# Altium PCB DevBoard.PcbDoc
Units mm, origin at the board's own origin, x right, y up, seen from the top; angles counter-clockwise.
Board outline 63.5 x 32.7 mm, 2 copper layers (Top Layer, Bottom Layer); 43 components, 53 nets, 211 pads, 137 vias.
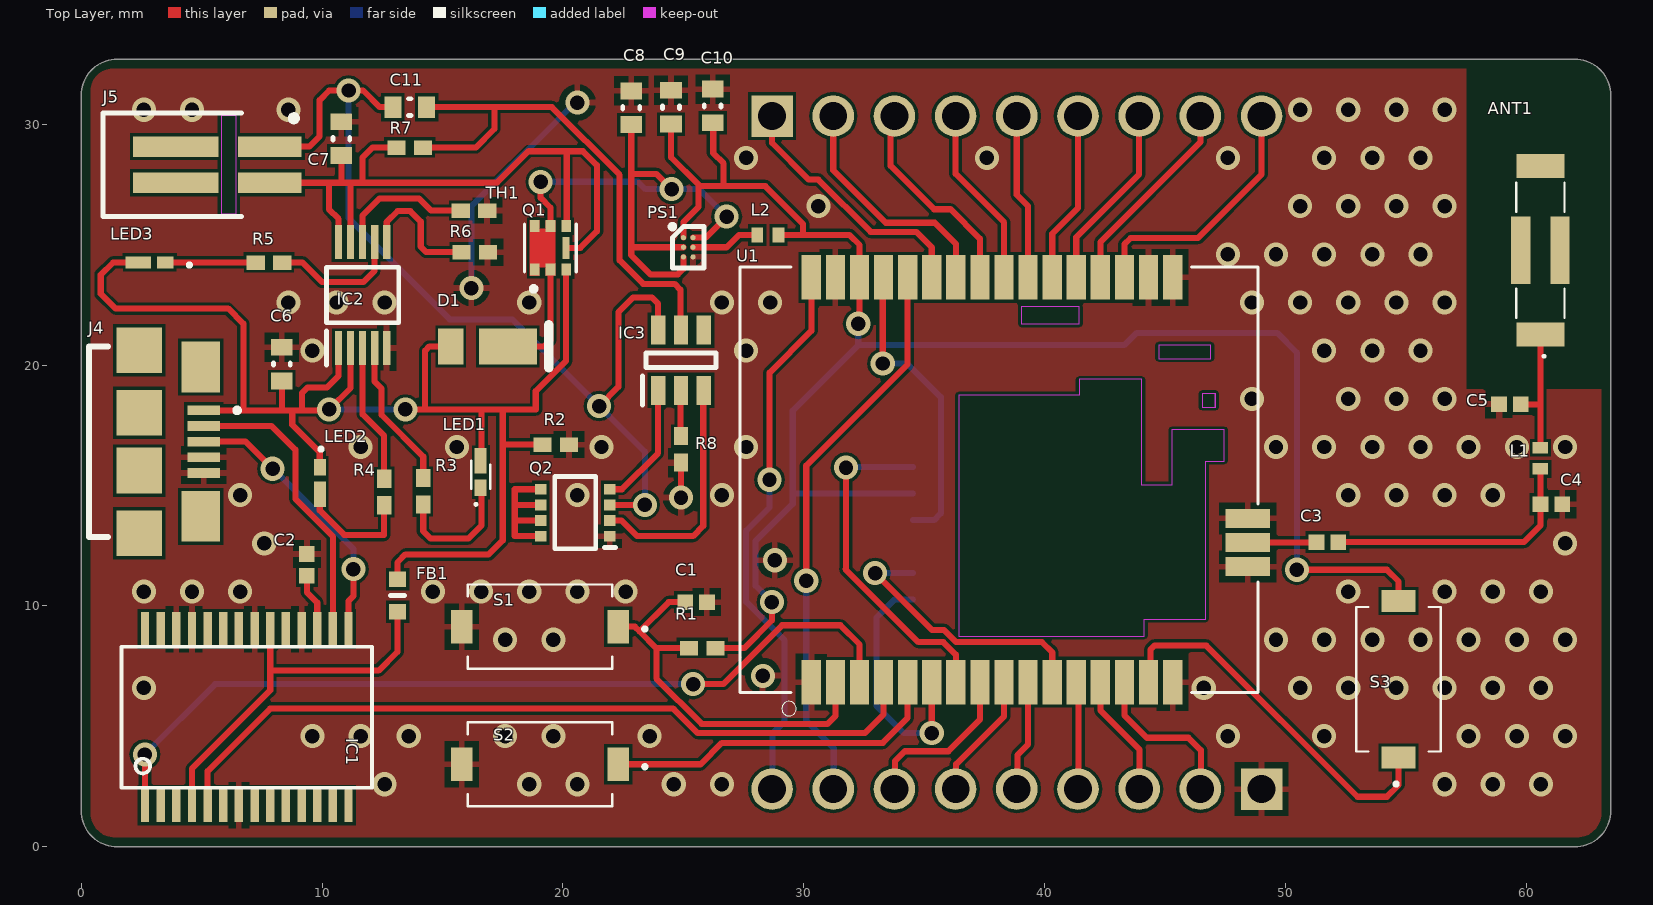
[diagram p0: Top Layer view]
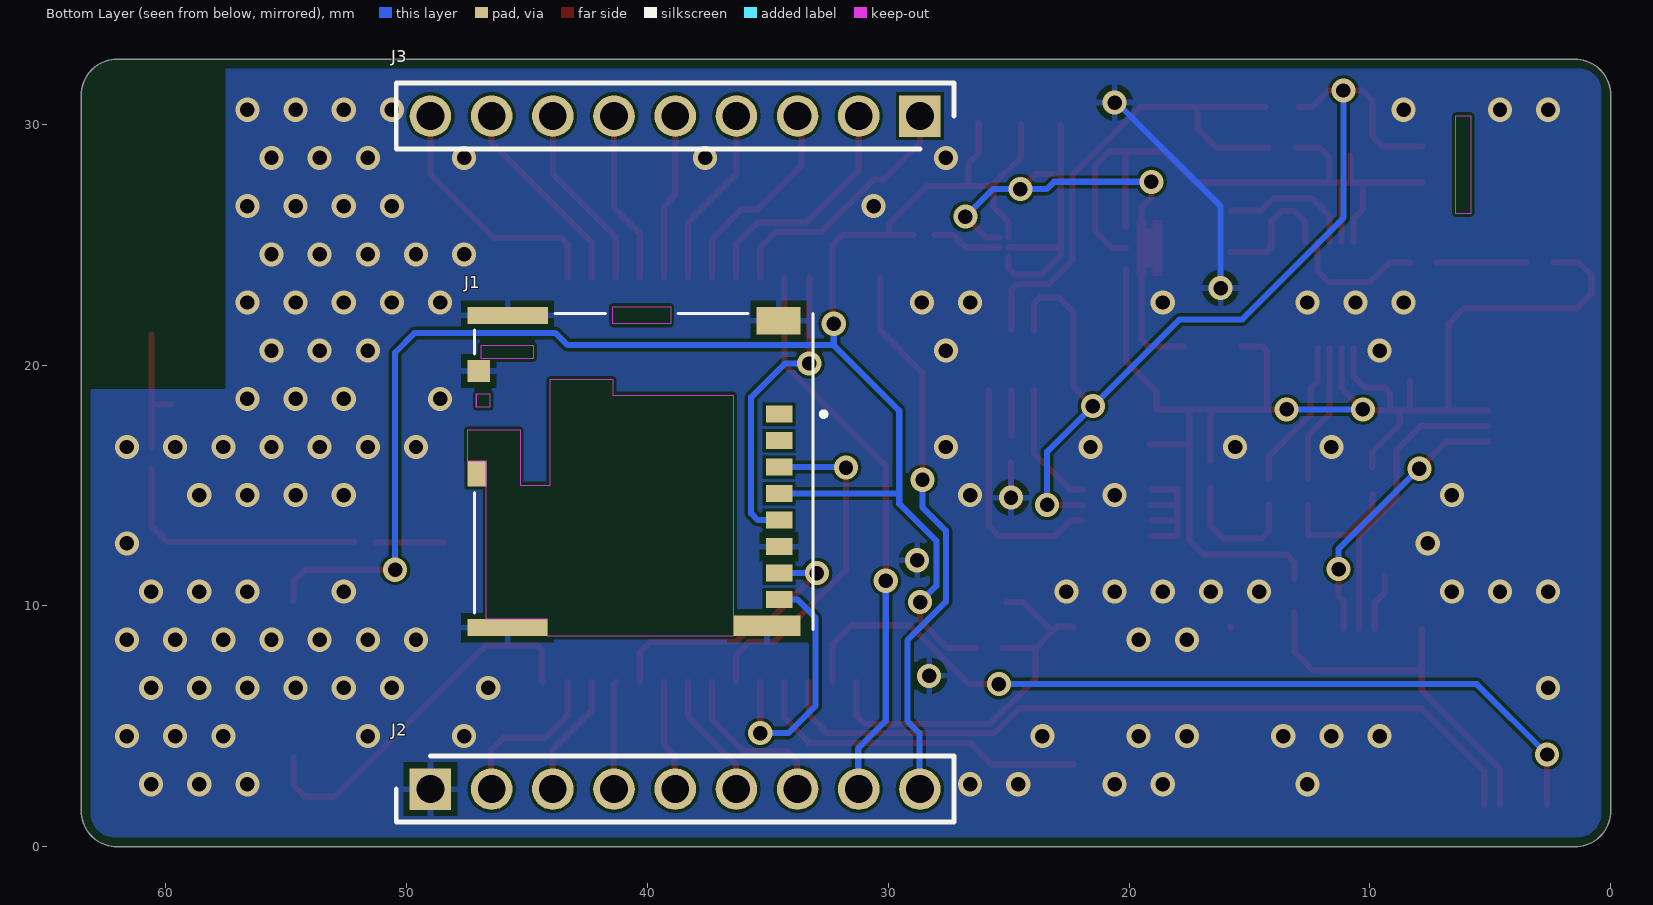
[diagram p1: Bottom Layer view, seen from below]
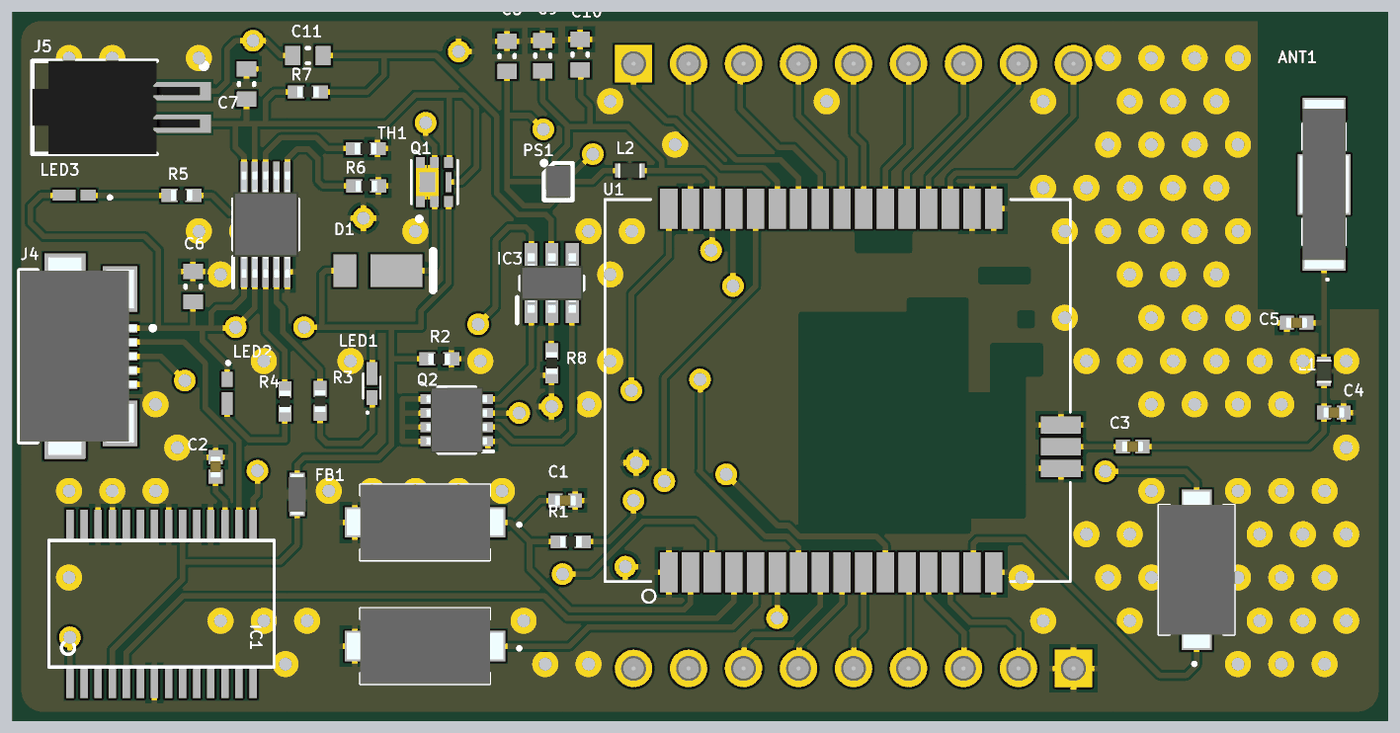
[diagram p2: 3D render of the assembled board from above, using the file's embedded part models]

## Layer stack, top to bottom
Top Solder: solder mask 0.0102, Solder Resist, Dk 3.5
Top Layer: signal copper 0.0356
Dielectric 1: dielectric 0.32, FR-4, Dk 4.8
Bottom Layer: signal copper 0.0356
Bottom Solder: solder mask 0.0102, Solder Resist, Dk 3.5

## Board outline
1.5,0 cw(c1.5,1.5) 0,1.5 0,31.2 cw(c1.5,31.2) 1.5,32.7 62,32.7 cw(c62,31.2) 63.5,31.2 63.5,1.5 cw(c62,1.5) 62,0

## Design rules (kind name [scope] priority, off if disabled: settings)
Clearance [All] p1: gap=0 ignorepadtopadclearanceinfootprint=FALSE
PolygonConnect [All] p1: connectstyle=Relief reliefconductorwidth=0.254 reliefentries=4 polygonreliefangle="90 Angle" airgapwidth=0.254
RoutingVias [All] p1: holewidth=0.6 width=1 viastyle="Through Hole" minholewidth=0.6 minwidth=1 maxholewidth=0.6 maxwidth=1
SolderMaskExpansion [All] p1: expansion=0.102
Width [All] p1: maxlimit=0.254 minlimit=0.254 preferedwidth=0.254
30 further rules are at their usual default settings.

## Components (designator, comment, footprint, x,y, rotation, side; value= is the part's Value field where it differs from the comment)
ANT1 "2450AT43B100E" 2450AT43B100E 60.579,24.765 r270 top
C1 "100nF 0402" CAPC1005X56N 25.527,10.16 r0 top
C2 "100pF 0402" CAPC1005X56N 9.373,11.709 r90 top
C3 "10pF 0402" CAPC1005X56N 51.733,12.649 r0 top
C4 "1,8pF 0402" CAPC1005X56N 61.029,14.224 r180 top
C5 "2,7pF 0402" CAPC1005X56N 59.309,18.369 r0 top
C6 "4,7uF 0603" CAPC0603(1608)100_L 8.331,20.041 r270 top value=1uF
C7 "4,7uF 0603" CAPC0603(1608)100_L 10.8,29.4 r270 top value=1uF
C8 "2,2uF 10V 0603" CAPC0603(1608)100_L 22.835,30.683 r270 top value=1uF
C9 "1uF 10V 0603" CAPC0603(1608)100_L 24.486,30.709 r270 top value=1uF
C10 "10uF 10V 0603" CAPC0603(1608)100_L 26.213,30.759 r270 top value=1uF
C11 "100nF 0603" CAPC0603(1608)100_L 13.64,30.709 r0 top value=1uF
D1 "DFLS160-7" DIOD-POWERDI123-2_V 16.866,20.777 r0 top
FB1 "BLM18SG331TN1D" BLM18SG121TN1J 13.132,10.439 r90 top
IC1 "FT232RL" SSOP28-LD 6.874,5.386 r0 top
IC2 "MCP73833-AMI_UN" SOP50P490X110-10N 11.684,22.911 r90 top
IC3 "S-8261ABJMD-G3JT2x" SOT95P275X135-6N 24.9,20.2 r90 top
J1 "503398-1892" MOLEX_503398-1892 40.154,15.584 r270 bottom
J2 "61300911121" HDRV9W95P0X254_1X9_2286X254X874P 49,2.4 r180 bottom
J3 "61300911121" HDRV9W95P0X254_1X9_2286X254X874P 28.68,30.34 r0 bottom
J4 "10118192-0001LF" 101181920001LF 3.406,16.821 r270 top
J5 "Conn_Molex_0874380243_eec" MOLEX_0874380243_0 3.779,28.321 r270 top
L1 "2.2nH 0402" INDC1006X60X20LL10T10 60.579,16.129 r90 top
L2 "0,47nH 0402" INDC1006X60X20LL10T10 28.507,25.4 r0 top
LED1 "BLUE" KBDELPS212QHRI24Z55510S 16.586,15.469 r90 top
LED2 "GREEN" KGDELLS122JGKH24 9.906,15.113 r0 top
LED3 "RED" KRDELPS122UHVI26H3Q4 2.845,24.257 r180 top
PS1 "LM3281YFQR" BGA6C40P2X3_116X144X68 25.2,24.892 r0 top
Q1 "DMP2066UFDE-7" MOSFET_DMP2066UFDE-7 19.482,24.867 r90 top
Q2 "QH8KA4TCR" SOTFL65P280X85-8N 20.512,13.873 r180 top
R1 "20k_0402" RESC1005X40N 25.781,8.255 r0 top
R2 "10k_0402" RESC1005X40N 19.7,16.7 r180 top
R3 "1k_0402" RESC1005X40N 14.199,14.757 r270 top
R4 "1k_0402" RESC1005X40N 12.573,14.732 r270 top
R5 "1k_0402" RESC1005X40N 7.798,24.257 r180 top
R6 "4k_0402" RESC1005X40N 16.332,24.689 r180 top
R7 "470_0402" RESC1005X40N 13.64,29.032 r180 top
R8 "2k_0402" RESC1005X40N 24.9,16.5 r90 top
S1 "PTS636_SM43J_SMTR_LFS" PTS636SM43JSMTRLFS 19.05,9.144 r180 top
S2 "PTS636_SM43J_SMTR_LFS" PTS636SM43JSMTRLFS 19.05,3.429 r180 top
S3 "PTS636_SM43J_SMTR_LFS" PTS636SM43JSMTRLFS 54.686,6.96 r90 top
TH1 "10k_thermistor_0402" RESC1005X40N 16.307,26.416 r180 top
U1 "W01-OEM" PYCOM_W01-OEM 38.1,15.24 r0 top

## Footprints (in the part's own frame and the unit in brackets; to place one, negate y for a bottom-side part, rotate by r counter-clockwise, add the part's x,y. Pads: shape width x height; smd on the part's side, far side on the other; paste and mask are expansions set on the pad)
2450AT43B100E [mm]
  rect 1x2 smd: 1(3.5,0) 2(-3.5,0)
  rect 2.8x0.8 smd: 3(0,0.815) 4(0,-0.815)
  silkscreen extent -2.8,-1 4.45,1, body extent -3.9,-1.13 3.9,1.13, height 2.2
101181920001LF [mm]
  rect 0.4x1.35 smd: 1(-1.3,1.682) 2(-0.65,1.682) 3(0,1.682) 4(0.65,1.682) 5(1.3,1.682)
  rect 2.1x1.6 smd: 6(-3.1,1.557) 7(3.1,1.557)
  rect 1.9x1.9 smd: 8(-1.2,-0.993) 9(1.2,-0.993) 10(-3.8,-0.993) 11(3.8,-0.993)
  silkscreen extent -3.95,-3.08 3.95,3.17, body extent -4.56,-3.08 4.56,2.32, height 2.9
BGA6C40P2X3_116X144X68 [mm]
  round 0.212 smd: A1(-0.2,0.4) A2(0.2,0.4) B1(-0.2,0) B2(0.2,0) C1(-0.2,-0.4) C2(0.2,-0.4)
  silkscreen extent -0.76,-0.86 0.66,0.96, body extent -0.58,-0.72 0.58,0.72, height 0.67
BLM18SG121TN1J [mm]
  rect 0.65x0.7 smd: 1(-0.675,0) 2(0.675,0)
  silkscreen extent 0,-0.3 0,0.3, body extent -0.93,-0.4 0.93,0.4, height 0.85
CAPC0603(1608)100_L [mm] "Chip Capacitor, Body 1.6x0.8mm, Height 1.0mm, IPC High Density"
  rect 0.7x0.9 smd: 1(-0.7,0) 2(0.7,0)
  silkscreen extent -0.05,-0.35 0.05,0.35, body extent -0.87,-0.47 0.88,0.48, height 1
CAPC1005X56N [mm]
  rect 0.65x0.64 smd: 1(-0.45,0) 2(0.45,0)
  body extent -0.5,-0.25 0.5,0.25, height 0.56
DIOD-POWERDI123-2_V [mm] "SOD, 2-Leads, Body 2.8x1.78mm"
  rect 1.05x1.5 smd: 1(-1.525,0)
  rect 2.4x1.5 smd: 2(0.85,0)
  silkscreen extent 2.55,-0.89 2.55,0.89, body extent -1.4,-0.89 1.4,0.89, height 1.01
HDRV9W95P0X254_1X9_2286X254X874P [mm]
  rect 1.725x1.725 hole 1.15: 1(0,0)
  round 1.725 hole 1.15: 2(2.54,0) 3(5.08,0) 4(7.62,0) 5(10.16,0) 6(12.7,0) 7(15.24,0) 8(17.78,0) 9(20.32,0)
  silkscreen extent -1.42,-1.37 21.74,1.37, body extent -1.27,-1.27 21.59,1.27, height 8.74
INDC1006X60X20LL10T10 [mm] "Chip Inductor, 2-Leads, Body 1.1x0.7mm, IPC High Density"
  rect 0.48x0.64 smd: 1(-0.44,0) 2(0.44,0)
  body extent -0.55,-0.35 0.55,0.35, height 0.6
KBDELPS212QHRI24Z55510S [mm]
  rect 0.7x0.5 smd: 1(-0.558,0)
  rect 1.05x0.5 smd: 2(0.558,0)
  silkscreen extent -1.3,-0.4 0.56,0.4
KGDELLS122JGKH24 [mm]
  rect 0.5x0.7 smd: 1(0,0.645)
  rect 0.5x1.05 smd: 2(0,-0.47)
  silkscreen extent 0,1.35 0.1,1.45
KRDELPS122UHVI26H3Q4 [mm]
  rect 0.7x0.5 smd: 1(-0.645,0)
  rect 1.05x0.5 smd: 2(0.47,0)
  silkscreen extent -1.7,0.05 -1.6,0.15
MOLEX_503398-1892 [mm]
  rect 0.7x1.1 smd: 1(-2.38,5.625) 2(-1.28,5.625) 3(-0.18,5.625) 4(0.92,5.625) 5(2.02,5.625) 6(3.12,5.625) 7(4.22,5.625) 8(5.32,5.625)
  rect 0.9x0.93 smd: 9(-4.17,-6.84)
  rect 1.05x0.78 smd: 10(0.095,-6.915)
  rect 1.14x1.83 smd: P1(-6.26,5.61)
  rect 0.86x2.8 smd: P2(6.4,5.125)
  rect 0.7x3.33 smd: P3(-6.48,-5.64) P4(6.48,-5.64)
  Keep-Out Layer region: 6.83,-3.975 6.13,-3.975 6.13,-6.525 -0.43,-6.525 -0.43,-7.305 -1.73,-7.305 -1.73,-5.125 0.57,-5.125 0.57,-3.875 -3.82,-3.875 -3.82,-1.275 -3.17,-1.275 -3.17,3.725 6.83,3.725
  Keep-Out Layer region: -2.67,-6.937 -3.225,-6.937 -3.225,-6.375 -2.67,-6.375
  Keep-Out Layer region: -4.685,-6.73 -5.239,-6.73 -5.239,-4.575 -4.685,-4.575
  Keep-Out Layer region: -6.13,-1.277 -6.842,-1.277 -6.842,1.125 -6.13,1.125
  Keep-Out Layer region: 6.83,-3.975 6.13,-3.975 6.13,-6.525 -0.43,-6.525 -0.43,-7.305 -1.73,-7.305 -1.73,-5.125 0.57,-5.125 0.57,-3.875 -3.82,-3.875 -3.82,-1.275 -3.17,-1.275 -3.17,3.725 6.83,3.725
  Keep-Out Layer region: -2.67,-6.93 -3.223,-6.93 -3.223,-6.375 -2.67,-6.375
  Keep-Out Layer region: -6.13,-1.276 -6.836,-1.276 -6.836,1.125 -6.13,1.125
  Keep-Out Layer region: -4.685,-6.738 -5.245,-6.738 -5.245,-4.575 -4.685,-4.575
  silkscreen extent -6.55,-7.02 6.55,7.57
MOLEX_0874380243_0 [mm]
  rect 0.85x2.65 smd paste+0 mask+0: 1(-0.75,4.05) 2(0.75,4.05)
  rect 0.85x3.55 smd paste+0 mask+0: ""(-0.75,0.15) ""(0.75,0.15)
  Keep-Out Layer region: -2.032,2.667 -2.032,2.032 2.032,2.032 2.032,2.667
  silkscreen extent -2.15,-2.88 2.15,5.18, body extent -2.35,-3.08 2.35,5.48, height 0.25
MOSFET_DMP2066UFDE-7 [mm]
  rect 0.5x0.4 smd: 1(-0.9,0.65) 2(-0.9,0) 3(-0.9,-0.65) 4(0.9,-0.65) 5(0.9,0) 6(0.9,0.65)
  rect 0.92x0.285 smd: 7(0,-0.65)
  Top Layer region: 1.15,0.46 0.8,0.46 0.8,0.19 1.13,0.19 1.13,-0.2 -1.15,-0.2 -1.15,0.19 -0.8,0.19 -0.8,0.46 -1.15,0.46 -1.15,0.85 1.15,0.85
  silkscreen extent -1.8,-1.07 1,1.07
PTS636SM43JSMTRLFS [mm]
  rect 0.9x1.4 smd: 1(-3.25,0) 2(3.25,0)
  silkscreen extent -4.4,-1.75 3,1.75, body extent -3.61,-1.75 3.61,1.75, height 4.4
PYCOM_W01-OEM [mm]
  rect 0.8x1.85 smd: 1(-7.79,-8.4) 2(-6.79,-8.4) 3(-5.79,-8.4) 4(-4.79,-8.4) 5(-3.79,-8.4) 6(-2.79,-8.4) 7(-1.79,-8.4) 8(-0.79,-8.4) 9(0.21,-8.4) 10(1.21,-8.4) 11(2.21,-8.4) 12(3.21,-8.4) 13(4.21,-8.4) 14(5.21,-8.4) 15(6.21,-8.4) 16(7.21,-8.4) 20(7.21,8.4) 21(6.21,8.4) 22(5.21,8.4) 23(4.21,8.4) 24(3.21,8.4) 25(2.21,8.4) 26(1.21,8.4) 27(0.21,8.4) 28(-0.79,8.4) 29(-1.79,8.4) 30(-2.79,8.4) 31(-3.79,8.4) 32(-4.79,8.4) 33(-5.79,8.4) 34(-6.79,8.4) 35(-7.79,8.4)
  rect 1.85x0.8 smd: 17(10.325,-3.605) 18(10.325,-2.605) 19(10.325,-1.605)
  silkscreen extent -10.75,-9.8 10.75,8.82
RESC1005X40N [mm]
  rect 0.75x0.6 smd: 1(-0.55,0) 2(0.55,0)
  body extent -0.5,-0.25 0.5,0.25, height 0.4
SOP50P490X110-10N [mm]
  rect 1.4x0.3 smd: 1(-2.2,1) 2(-2.2,0.5) 3(-2.2,0) 4(-2.2,-0.5) 5(-2.2,-1) 6(2.2,-1) 7(2.2,-0.5) 8(2.2,0) 9(2.2,0.5) 10(2.2,1)
  silkscreen extent -2.9,-1.5 1.15,1.5, body extent -2.45,-1.5 2.45,1.5, height 1.1
SOT95P275X135-6N [mm]
  rect 1.2x0.6 smd: 1(-1.25,0.95) 2(-1.25,0) 3(-1.25,-0.95) 4(1.25,-0.95) 5(1.25,0) 6(1.25,0.95)
  silkscreen extent -1.85,-1.45 0.3,1.6, body extent -1.38,-1.45 1.38,1.45, height 1.35
SOTFL65P280X85-8N [mm]
  rect 0.47x0.45 smd: 1(-1.435,0.975) 2(-1.435,0.325) 3(-1.435,-0.325) 4(-1.435,-0.975) 5(1.435,-0.975) 6(1.435,-0.325) 7(1.435,0.325) 8(1.435,0.975)
  silkscreen extent -1.67,-1.5 0.85,1.5, body extent -1.4,-1.5 1.4,1.5, height 0.85
SSOP28-LD [mm]
  rect 0.348x1.397 smd: 1(-4.225,-3.656) 2(-3.575,-3.656) 3(-2.925,-3.656) 4(-2.275,-3.656) 5(-1.625,-3.656) 6(-0.975,-3.656) 7(-0.325,-3.656) 8(0.325,-3.656) 9(0.975,-3.656) 10(1.625,-3.656) 11(2.275,-3.656) 12(2.925,-3.656) 13(3.575,-3.656) 14(4.225,-3.656) 15(4.225,3.656) 16(3.575,3.656) 17(2.925,3.656) 18(2.275,3.656) 19(1.625,3.656) 20(0.975,3.656) 21(0.325,3.656) 22(-0.325,3.656) 23(-0.975,3.656) 24(-1.625,3.656) 25(-2.275,3.656) 26(-2.925,3.656) 27(-3.575,3.656) 28(-4.225,3.656)
  silkscreen extent -5.2,-2.93 5.2,2.93

## Part data
ANT1: "Antenna", Manufacturer_Name="JOHANSON TECHNOLOGY", Mouser Part Number=609-2450AT43B100E, Arrow Part Number=2450AT43B100E, Arrow Price/Stock=https://www.arrow.com/en/products/2450at43b100e/johanson-dielectrics, Datasheet Link=https://componentsearchengine.com/Datasheets/2/2450AT43B100E.pdf, Height=2.1mm, Manufacturer_Part_Number=2450AT43B100E, Mouser Price/Stock=https://www.mouser.co.uk/ProductDetail/Johanson-Technology/2450AT43B100E?qs=yCnrNFeXz%252Bg12F05%252B89fnA%3D%3D
C1 C2 C3 C4 C5: library part 04025A1R8BAT2A, "Capacitor", Manufacturer_Name=AVX, Mouser Part Number=581-04025A1R8BAT2A, Arrow Part Number=04025A1R8BAT2A, Datasheet Link=http://www.mouser.com/catalog/supplier/library/pdf/AVXSurfaceMountCeramic.pdf, Height=0.56mm, Manufacturer_Part_Number=04025A1R8BAT2A, Mouser Price/Stock=https://www.mouser.com/Search/Refine.aspx?Keyword=581-04025A1R8BAT2A
C6 C7 C8 C9 C10 C11: library part CMP-1035-02734-1, "CAP 1uF 10V ±20% 0603 (1608 Metric) Thickness 1mm SMD", Case-EIA=0603, Case-Metric=1608, Rated Voltage="10 V", Tolerance=±20%, Max Thickness="1 mm", Technology=SMT
D1: library part CMP-2000-07449-1, "Schottky Barrier Rectifier, 60 V, 1 A, -65 to 150 degC, 2-Pin SMD, RoHS, Tape and Reel", Average Rectified Current=1A, Capacitance=67pF, Case\/Package=SMD/SMT, Forward Voltage=500mV, Manufacturer="Diodes Inc", Max Forward Surge Current (Ifsm)=50A, Max Operating Temperature=150degC, Max Repetitive Reverse Voltage (Vrrm)=60V, Min Operating Temperature=-65degC, Package Description="2-Pin Small Outline Diode, Body 2.8 x 1.78 mm", Package Quantity=3000, Package Reference=POWERDI123-2, Peak Reverse Current=100uA, Contact Plating=Matte, Current Rating=1A, Datasheet URL=https://www.diodes.com/assets/Datasheets/ds30548.pdf, Datasheet Version="Rev. 8-2, 05/2017", Element Configuration=Single, Forward Current=1A, Height=0.98mm, Lead Free=LeadFree, Length=2.8mm, Manufacturer URL=http://www.diodes.com/, Mount=SurfaceMount, Mounting Technology=SurfaceMount, Number of Pins=2, Output Current=1A, Packaging=TapeandReel, Peak Non-Repetitive Surge Current=50A, Polarity=Standard, Radiation Hardening=No, REACH SVHC=NoSVHC, Reverse Voltage (DC)=60V, RoHSCompliant=true, Termination=SMD/SMT, Voltage Rating (DC)=60V, Width=1.78mm
FB1: "Ferrite Bead", Manufacturer_Name="Murata Electronics", Mouser Part Number=81-BLM18SG331TN1D, Arrow Part Number=BLM18SG331TN1D, Arrow Price/Stock=https://www.arrow.com/en/products/blm18sg331tn1d/murata-manufacturing, Datasheet Link=https://www.murata.com/en-us/products/productdetail?partno=BLM18SG331TN1%23, Height=0.75mm, Manufacturer_Part_Number=BLM18SG331TN1D, Mouser Price/Stock=https://www.mouser.co.uk/ProductDetail/Murata-Electronics/BLM18SG331TN1D?qs=Hp4IEBVVqKI2B%252BK%252BkpMX7w%3D%3D
IC1: "USB ë¸Œë", Package="SSOP-28 FTDI, Future", Availability=Unavailable, MF="FTDI, Future", MP=FT232RL, Price=None, SnapEDA_Link=https://www.snapeda.com/parts/FT232RL/FTDI%2C%20Future%20Technology%20Devices%20International%20Ltd/view-part/1077088/?ref=snap
IC2: "Integrated Circuit", Arrow Part Number=MCP73833-AMI/UN, Manufacturer_Name=Microchip, Mouser Part Number=579-MCP73833-AMI/UN, Arrow Price/Stock=https://www.arrow.com/en/products/mcp73833-amiun/microchip-technology, Datasheet Link=http://componentsearchengine.com/Datasheets/1/MCP73833-AMI_UN.pdf, Height=1.1mm, Manufacturer_Part_Number=MCP73833-AMI/UN, Mouser Price/Stock=https://www.mouser.co.uk/ProductDetail/Microchip-Technology/MCP73833-AMI-UN?qs=Fxu3fLyJv8fd%2FGnsUSC9lg%3D%3D
IC3: library part S-8261ACMMD-G4MT2U, "Integrated Circuit", Manufacturer_Name="ABLIC U.S.A. Inc.", Mouser Part Number=628-S8261ACMMDG4MT2G, Arrow Part Number=S-8261ABJMD-G3JT2x, Datasheet Link=https://www.mouser.fr/datasheet/2/360/S8261_E-1365905.pdf, Height=1.35mm, Manufacturer_Part_Number=S-8261ABJMD-G3JT2x, Mouser Price/Stock=https://www.mouser.com/Search/Refine.aspx?Keyword=628-S8261ACMMDG4MT2G
J1: "9 _8 + 1_ Position Card Connector microSD™ Surface Mount, Right Angle Gold", Package=None, Digi-Key_Part_Number=WM11190CT-ND, Digi-Key_Purchase_URL=https://www.digikey.com/product-detail/en/molex/5033981892/WM11190CT-ND/5230912?utm_source=snapeda&utm_medium=aggregator&utm_campaign=symbol, MF=Molex, MP=5033981892, SnapEDA_Link=https://www.snapeda.com/parts/5033981892/Molex/view-part/1614473/?ref=snap
J2 J3: "Connector", Manufacturer_Name="Wurth Elektronik", Mouser Part Number=710-61300911121, Arrow Part Number=61300911121, Datasheet Link=http://uk.rs-online.com/web/p/products/8281608, Height=8.74mm, Manufacturer_Part_Number=61300911121, Mouser Price/Stock=https://www.mouser.com/Search/Refine.aspx?Keyword=710-61300911121
J4: "USB - micro B USB 2.0 Receptacle Connector 5 Position Surface Mount, Right Angle", Package=None, Availability=Unavailable, MF="Amphenol ICC", MP=10118192-0001LF, Price=None, SnapEDA_Link=https://www.snapeda.com/parts/10118192-0001LF/Amphenol%20FCI/view-part/2897676/?ref=snap
J5: "CONN HEADER 2POS 1.5MM R/A SMD", Digikey Part Number=WM7646CT-ND, Manufacturer=Molex, Mouser Part Number=538-87438-0243, Package=HDR02, Part Number=0874380243, Temperature="-55°C to +105°C", Temperature Range High=+105°C, Temperature Range Low=-55°C, ComponentLink1Description=Upverter, ComponentLink1URL=https://upverter.com/upn/revision/9247828ede5b33c1/, ComponentLink2Description=Datasheet, ComponentLink2URL=http://www.molex.com/pdm_docs/sd/874380243_sd.pdf, Digikey Description="CONN HEADER 2POS 1.5MM R/A SMD", helpURL=https://upverter.com/upn/revision/9247828ede5b33c1/, Lead Free=yes, Price=0.47257560661, RoHS=TRUE, Supplier 1=Digi-Key, Supplier 2=Mouser, Supplier Part Number 1=WM7646CT-ND, Supplier Part Number 2=538-87438-0243
L1 L2: library part CMP-2000-06594-1, "Chip Inductor, 10 nH, +/- 5%, 500 mA, -55 to 125 degC, 0402 (1005 Metric), RoHS, Tape and Reel", Case Size/Dimension=0402, DC Resistance=0.17O, Inductance-Nom=10nH, Manufacturer=Murata, Package Description="2-Pin Surface Mount Device, Body 1 x 0.6 mm", Rated Current-Max=500mA, Tolerance (%)=±5%, Datasheet URL=http://search.murata.co.jp/Ceramy/image/img/PDF/ENG/L0075S0080LQW15A_00.pdf, Datasheet Version=09/2012, Manufacturer URL=http://www.murata.com/, Mounting Technology=SurfaceMount, Package Reference=0402, Type=Molded
LED1: library part KB_DELPS2.12-QHRI-24-Z555-10-S, "LED_BLUE", Arrow Part Number="KB DELPS2.12-QHRI-24-Z555-10-S", Manufacturer_Name=OSRAM, Mouser Part Number=720-KBDELPS212A6350, Datasheet Link=https://www.mouser.in/ProductDetail/OSRAM-Opto-Semiconductors/KB-DELPS212-QHRI-24-Z555-10-S?qs=%2Fha2pyFaduguGXnxUQPQvOwqvA0l1GbBGsJPdL2BNxwU00XGTd8yf8CXZb0fb41Mz9FjufZkGgQ%3D, Manufacturer_Part_Number="KB DELPS2.12-QHRI-24-Z555-10-S", Mouser Price/Stock=https://www.mouser.co.uk/ProductDetail/OSRAM-Opto-Semiconductors/KB-DELPS212-QHRI-24-Z555-10-S?qs=OTrKUuiFdkb2rezknsx9mQ%3D%3D
LED2: library part KG_DELLS1.22-JGKH-24, "LED_GREEN", Arrow Part Number="KG DELLS1.22-JGKH-24", Manufacturer_Name=OSRAM, Mouser Part Number=720-KGDELLS122A4849, Arrow Price/Stock=https://www.arrow.com/en/products/kg-dells1.22-jgkh-24/osram-opto-semiconductors, Datasheet Link=https://dammedia.osram.info/media/resource/hires/osram-dam-5423212/KG%20DELLS1.22_EN.pdf, Manufacturer_Part_Number="KG DELLS1.22-JGKH-24", Mouser Price/Stock=https://www.mouser.co.uk/ProductDetail/OSRAM-Opto-Semiconductors/KG-DELLS122-JGKH-24?qs=XeJtXLiO41QWpmNP80zu3g%3D%3D
LED3: library part KR_DELPS1.22-UHVI-26-H3Q4, "LED_RED", Arrow Part Number="KR DELPS1.22-UHVI-26-H3Q4", Manufacturer_Name=OSRAM, Mouser Part Number=720-KRDELPS122A5163, Datasheet Link=https://www.mouser.co.uk/ProductDetail/OSRAM-Opto-Semiconductors/KR-DELPS122-UHVI-26-H3Q4?qs=sGAEpiMZZMseGfSY3csMkXiJOH5X%252BfXw4kv80xILcLqjWCSyCkalLg%3D%3D, Manufacturer_Part_Number="KR DELPS1.22-UHVI-26-H3Q4", Mouser Price/Stock=https://www.mouser.co.uk/ProductDetail/OSRAM-Opto-Semiconductors/KR-DELPS122-UHVI-26-H3Q4?qs=XeJtXLiO41Rxc1kIEv94zQ%3D%3D
PS1: "Power Supply", Manufacturer_Name="Texas Instruments", Mouser Part Number=595-LM3281YFQR, Arrow Part Number=LM3281YFQR, Arrow Price/Stock=https://www.arrow.com/en/products/lm3281yfqr/texas-instruments, Datasheet Link=http://www.ti.com/lit/gpn/lm3281, Height=0.675mm, Manufacturer_Part_Number=LM3281YFQR, Mouser Price/Stock=https://www.mouser.com/Search/Refine.aspx?Keyword=595-LM3281YFQR
Q1: "P-Channel 20V 6.2A (Ta) 660mW (Ta) Surface Mount U-DFN2020-6 (Type E)", Package="UDFN-6 Diodes Inc.", Availability=Unavailable, DigiKey-Purchase-URL=https://snapeda.com/shop?store=DigiKey&id=488338, MF="Diodes Inc.", MP=DMP2066UFDE-7, Price=None, SnapEDA_Link=https://www.snapeda.com/parts/DMP2066UFDE-7/Diodes%20Inc./view-part/488338/?ref=snap
Q2: "MOSFET (N-Channel)", Manufacturer_Name="ROHM Semiconductor", Mouser Part Number=755-QH8KA4TCR, Arrow Part Number=QH8KA4TCR, Datasheet Link=https://www.rohm.com/datasheet/QH8KA4/qh8ka4tcr-e, Height=0.85mm, Manufacturer_Part_Number=QH8KA4TCR, Mouser Price/Stock=https://www.mouser.co.uk/ProductDetail/ROHM-Semiconductor/QH8KA4TCR?qs=4v%252BiZTmLVHGNdU9QexsYgA%3D%3D
R1 R2 R3 R4 R5 R6 R7 R8: library part CR0402-FX-2002GLF, "Resistor", Manufacturer_Name=Bourns, Mouser Part Number=652-CR0402FX-2002GLF, Arrow Part Number=CR0402-FX-2002GLF, Datasheet Link=https://www.bourns.com/pdfs/CR0402.pdf, Height=0.4mm, Manufacturer_Part_Number=CR0402-FX-2002GLF, Mouser Price/Stock=https://www.mouser.com/Search/Refine.aspx?Keyword=652-CR0402FX-2002GLF
S1 S2 S3: "Switch", Arrow Part Number="PTS636 SM43J SMTR LFS", Manufacturer_Name="C & K COMPONENTS", Mouser Part Number=611-PTS636SM43JSMTRL, Arrow Price/Stock=https://www.arrow.com/en/products/pts636-sm43j-smtr-lfs/ck, Datasheet Link="https://componentsearchengine.com/Datasheets/1/PTS636 SM43J SMTR LFS.pdf", Height=4.3mm, Manufacturer_Part_Number="PTS636 SM43J SMTR LFS", Mouser Price/Stock=https://www.mouser.co.uk/ProductDetail/CK/PTS636-SM43J-SMTR-LFS?qs=vLWxofP3U2wboJ6ciMafNg%3D%3D
TH1: library part CR0402-FX-2002GLF, "NCU15XH103D60RC", Manufacturer_Name=Bourns, Mouser Part Number=652-CR0402FX-2002GLF, Arrow Part Number=CR0402-FX-2002GLF, Datasheet Link=https://www.bourns.com/pdfs/CR0402.pdf, Height=0.4mm, Manufacturer_Part_Number=CR0402-FX-2002GLF, Mouser Price/Stock=https://www.mouser.com/Search/Refine.aspx?Keyword=652-CR0402FX-2002GLF
U1: "The W01 is the WiPy OEM module. It works exactly like your WiPy but we’ve trimmed a few bits to make it smaller and easier to integrate. Dual network BLE and WiFi.", Package=None, Availability=Unavailable, MF=Pycom, MP=W01-OEM, Price=None, SnapEDA_Link=https://www.snapeda.com/parts/W01-OEM/Pycom/view-part/1039089/?ref=snap

## Via types
v1: diameter 1, hole 0.6, Top Layer to Bottom Layer, 137 vias

## Nets (pads, with @x,y where several pads share a name; then routed paths per layer and width w, separated by ;. In a path a pad name is that pad's centre, name@x,y a point inside that pad or via, vN(x,y) a via of type N, cw(c..) or ccw(c..) an arc to the next point about the centre after c; other vN are vias at no path point)
1V8: J2.9 U1.35 | length 23.2
  Top Layer w0.254: v1(28.575,15.24) 28.575,19.685 30.31,21.42 U1.35
  Bottom Layer w0.254: v1(28.575,15.24) 28.575,14.097 27.6,13.122 27.6,10.17 29.2,8.57 29.2,5.222 28.702,4.724 J2.9@28.702,2.413
CMD: J1.3 U1.7 | length 14.2
  Top Layer w0.254: v1(31.75,15.748) 31.75,11.557 31.725,11.532 34.757,8.5 35.785,8.5 36.31,7.975 U1.7
  Bottom Layer w0.254: v1(31.75,15.748) 31.766,15.764 J1.3
D+: IC1.15 J4.3 | length 11.5
  Top Layer w0.254: J4.3 6.826,16.821 v1(7.95,15.697) ; IC1.15 11.099,10.21 11.303,10.414 v1(11.303,11.532)
  Bottom Layer w0.254: v1(7.95,15.697) 7.976,15.697 11.303,12.37 v1(11.303,11.532)
D-: IC1.16 J4.2 | length 12.3
  Top Layer w0.254: J4.2 7.904,17.471 8.89,16.485 8.89,14.447 10.449,12.889 IC1.16
GND: C1.2 C2.2 C4.1 C5.1 C6.1 C7.1 C8.1 C9.1 C10.1 IC1.7 IC1.18 IC1.21 IC1.25 IC1.26 IC2.5 J1.6 J1.9 J1.P1 J1.P2 J1.P3 J1.P4 J2.1 J4.4 J4.5 PS1.C2 Q2.1 R2.1 R6.1 R8.1 S1.2 S2.2 TH1.1 U1.1 U1.16 U1.17 U1.19 U1.20 U1.21 U1.34 | length 11.1
  Top Layer w0.254: S1.2@15.756,9.1 S1.2 ; v1(24.9,14.5) R8.1
  Bottom Layer w0.254: v1(16.2,23.2) 16.2,26.6 20.5,30.9 v1(20.6,30.9)
  other v1: 12.6,2.6 18.6,2.6 20.6,2.6 24.6,2.6 26.6,2.6 56.6,2.6 58.6,2.6 60.6,2.6 9.6,4.6 11.6,4.6 13.6,4.6 17.6,4.6 19.6,4.6 23.6,4.6 47.6,4.6 51.6,4.6 57.6,4.6 59.6,4.6 61.6,4.6 2.6,6.6 46.6,6.6 50.6,6.6 52.6,6.6 54.6,6.6 56.6,6.6 58.6,6.6 60.6,6.6 28.3,7.1 17.6,8.6 19.6,8.6 49.6,8.6 51.6,8.6 53.6,8.6 55.6,8.6 57.6,8.6 59.6,8.6 61.6,8.6 2.6,10.6 4.6,10.6 6.6,10.6 14.6,10.6 16.6,10.6 18.6,10.6 20.6,10.6 22.6,10.6 52.6,10.6 56.6,10.6 58.6,10.6 60.6,10.6 28.8,11.9 7.6,12.6 61.6,12.6 6.6,14.6 20.6,14.6 26.6,14.6 52.6,14.6 54.6,14.6 56.6,14.6 58.6,14.6 11.6,16.6 15.6,16.6 21.6,16.6 27.6,16.6 49.6,16.6 51.6,16.6 53.6,16.6 55.6,16.6 57.6,16.6 59.6,16.6 61.6,16.6 48.6,18.6 52.6,18.6 54.6,18.6 56.6,18.6 9.6,20.6 27.6,20.6 51.6,20.6 53.6,20.6 55.6,20.6 8.6,22.6 10.6,22.6 12.6,22.6 18.6,22.6 26.6,22.6 28.6,22.6 48.6,22.6 50.6,22.6 52.6,22.6 54.6,22.6 56.6,22.6 47.6,24.6 49.6,24.6 51.6,24.6 53.6,24.6 55.6,24.6 30.6,26.6 50.6,26.6 52.6,26.6 54.6,26.6 56.6,26.6 27.6,28.6 37.6,28.6 47.6,28.6 51.6,28.6 53.6,28.6 55.6,28.6 2.6,30.6 4.6,30.6 8.6,30.6 50.6,30.6 52.6,30.6 54.6,30.6 56.6,30.6
GPIO25: J2.8 U1.31 | length 23.4
  Top Layer w0.254: v1(30.099,11.049) 30.099,15.825 34.31,20.036 U1.31
  Bottom Layer w0.254: v1(30.099,11.049) 30.099,5.232 31.242,4.089 J2.8@31.242,2.413
NetANT1_1: ANT1.1 C5.2 L1.2 | length 5.5
  Top Layer w0.254: C5.2 60.579,18.369 ; ANT1.1 60.579,18.369 ; L1.2@60.6,16.59 L1.2 60.579,18.369
NetC1_1: C1.1 R1.1 S1.1 U1.2 | length 16.7
  Top Layer w0.254: S1.1 22.987,9.144 23.177,8.954 ; C1.1 24.384,10.16 23.177,8.954 ; R1.1 23.876,8.255 ; U1.2 31.31,5.427 30.988,5.105 25.756,5.105 23.876,6.985 23.876,8.255 ; 23.177,8.954 23.876,8.255
NetC2_1: C2.1 IC1.17 | length 2.4
  Top Layer w0.254: C2.1 9.373,10.566 9.799,10.14 IC1.17
NetC3_1: C3.1 U1.18 | length 2.9
  Top Layer w0.254: U1.18 51.268,12.635 C3.1
NetC3_2: C3.2 C4.2 L1.1 | length 11
  Top Layer w0.254: C3.2 59.893,12.649 60.579,13.335 C4.2 L1.1
NetC8_2: C8.2 D1.2 PS1.A2 PS1.B1 PS1.C1 Q1.1 Q1.2 Q1.5 Q1.6 | length 29.2
  Top Layer w0.254: D1.2 19.228,20.777 19.482,21.031 Q1.2 ; v1(19.075,27.61) 19.075,26.949 19.482,26.543 Q1.5 ; C8.2 22.835,24.565 23.632,23.768 24.768,23.768 25,24 PS1.C1 ; 22.987,24.892 PS1.B1 ; 22.987,27.94 23.876,27.94 v1(24.511,27.305) ; PS1.A2 25.927,25.292 v1(26.797,26.162)
  Bottom Layer w0.254: v1(19.075,27.61) 23.114,27.61 23.419,27.305 v1(24.511,27.305) 25.654,27.305 v1(26.797,26.162)
NetC11_2: C11.2 IC3.5 R7.1 | length 21.6
  Top Layer w0.254: R7.1 16.383,29.032 17.152,29.801 17.152,30.709 ; C11.2 17.152,30.709 ; IC3.5@24.874,21.45 24.874,23.126 24.632,23.368 23.332,23.368 22.352,24.348 22.352,27.895 19.538,30.709 17.152,30.709
NetFB1_1: FB1.1 IC1.4 IC1.20 | length 15.9
  Top Layer w0.254: IC1.4 4.599,3.252 7.849,6.502 7.849,7.315 ; IC1.20 7.849,7.315 ; FB1.1 13.132,8.103 12.344,7.315 7.849,7.315
NetIC2_3: IC2.3 R4.1 | length 5.8
  Top Layer w0.254: IC2.3 11.684,17.958 12.573,17.069 R4.1
NetIC2_4: IC2.4 R3.1 | length 6.2
  Top Layer w0.254: IC2.4 12.184,19.312 12.471,19.025 12.471,17.929 14.199,16.201 R3.1
NetIC2_6: IC2.6 R6.2 | length 5.4
  Top Layer w0.254: IC2.6 12.684,25.943 13.132,26.391 13.665,26.391 14.097,25.959 14.097,24.918 14.326,24.689 R6.2
NetIC2_7: IC2.7 R5.1 | length 5.6
  Top Layer w0.254: R5.1 9.195,24.257 10.008,23.444 11.709,23.444 12.184,23.919 IC2.7
NetIC2_8: IC2.8 TH1.2 | length 5.7
  Top Layer w0.254: IC2.8 11.684,26.213 12.395,26.924 14.021,26.924 14.529,26.416 TH1.2
NetIC3_1: IC3.1 Q2.4 | length 5.2
  Top Layer w0.254: Q2.4 22.448,14.848 23.95,16.35 IC3.1
NetIC3_2: IC3.2 R8.2 | length 1.9
  Top Layer w0.254: R8.2@24.874,17.05 IC3.2@24.874,18.95
NetIC3_3: IC3.3 Q2.2 | length 9.9
  Top Layer w0.254: Q2.2 22.436,13.548 23.084,12.9 25.4,12.9 25.824,13.324 IC3.3@25.824,18.95
NetJ2_2: J2.2 U1.14 | length 6.8
  Top Layer w0.254: U1.14 43.31,5.458 44.238,4.53 45.965,4.53 46.482,4.013 J2.2@46.482,2.413
NetJ2_3: J2.3 U1.13 | length 5.1
  Top Layer w0.254: U1.13 42.31,5.671 43.942,4.039 J2.3@43.942,2.413
NetJ2_4: J2.4 U1.12 | length 4.5
  Top Layer w0.254: U1.12 41.402,6.748 J2.4@41.402,2.413
NetJ2_5: J2.5 U1.10 | length 4.6
  Top Layer w0.254: J2.5@38.862,2.413 38.862,3.81 39.31,4.258 U1.10
NetJ2_6: J2.6 U1.9 | length 5.3
  Top Layer w0.254: J2.6@36.322,2.413 36.322,3.429 38.31,5.417 U1.9
NetJ2_7: J2.7 U1.8 | length 6.9
  Top Layer w0.254: J2.7@33.782,2.413 33.782,3.556 34.196,3.97 36,3.97 37.31,5.281 U1.8
NetJ3_1: J3.1 U1.30 | length 10.8
  Top Layer w0.254: J3.1 28.68,29.22 30.2,27.7 30.6,27.7 32.773,25.527 34.671,25.527 35.31,24.888 U1.30
NetJ3_2: J3.2 U1.29 | length 10
  Top Layer w0.254: J3.2 31.22,28.089 33.401,25.908 35.433,25.908 36.31,25.031 U1.29
NetJ3_3: J3.3 U1.28 | length 8.7
  Top Layer w0.254: J3.3@33.6,30.5 33.6,28.274 35.407,26.468 36.042,26.468 ; 36.09,26.468 37.31,25.248 U1.28
NetJ3_4: J3.4 U1.27 | length 7.5
  Top Layer w0.254: J3.4 36.3,27.937 38.31,25.927 U1.27
NetJ3_5: J3.5 U1.26 | length 6.9
  Top Layer w0.254: J3.5 38.84,27.073 39.31,26.603 U1.26
NetJ3_6: J3.6 U1.25 | length 7.1
  Top Layer w0.254: U1.25 40.31,25.451 41.38,26.521 J3.6
NetJ3_7: J3.7 U1.24 | length 7.8
  Top Layer w0.254: U1.24 41.31,25.308 43.92,27.918 J3.7
NetJ3_8: J3.8 U1.23 | length 8.4
  Top Layer w0.254: U1.23 42.31,25.11 46.46,29.26 J3.8
NetJ3_9: J3.9 U1.22 | length 10.7
  Top Layer w0.254: U1.22 43.31,25.022 43.561,25.273 46.355,25.273 49,27.918 J3.9
NetL2_1: L2.1 PS1.B2 | length 2.9
  Top Layer w0.254: PS1.B2 26.797,24.892 27.305,25.4 L2.1
NetLED1_1: LED1.1 R3.2 | length 5.4
  Top Layer w0.254: R3.2 14.199,13.106 14.505,12.8 16.077,12.8 16.612,13.335 LED1.1@16.612,14.911
NetLED2_2: LED2.2 R4.2 | length 5
  Top Layer w0.254: LED2.2 9.906,13.97 10.922,12.954 12.573,12.954 R4.2
NetLED3_1: LED3.1 R5.2 | length 3.8
  Top Layer w0.254: LED3.1 R5.2
NetQ2_5: Q2.5 Q2.6 Q2.7 Q2.8 | length 6.3
  Top Layer w0.254: Q2.8 18,12.898 18,13.548 ; Q2.7 18,13.548 ; Q2.6 18,14.198 ; Q2.5 18,14.848 18,14.198 ; 18,13.548 18,14.198
NetS2_1: S2.1 U1.5 | length 14.3
  Top Layer w0.254: S2.1 25.711,3.429 26.6,4.318 33.274,4.318 34.31,5.354 U1.5
NetS3_1: S3.1 U1.15 | length 15.7
  Top Layer w0.254: U1.15 44.383,6.913 44.383,8.188 44.552,8.357 46.711,8.357 52.984,2.083 54.204,2.083 54.686,2.565 S3.1
RXD: IC1.5 U1.4 | length 32.6
  Top Layer w0.254: IC1.5 5.249,3.14 7.849,5.74 24.574,5.74 ; 24.607,5.715 25.598,4.724 32.537,4.724 33.31,5.497 U1.4
SD_CLK: J1.5 U1.32 | length 12.7
  Top Layer w0.254: v1(33.274,20.066) 33.274,23.604 U1.32
  Bottom Layer w0.254: v1(33.274,20.066) 34.29,20.066 35.687,18.669 35.687,13.843 35.408,13.564 J1.5
SD_DATA0: J1.7 U1.11 | length 11.5
  Top Layer w0.254: v1@32.956,11.367 v1(32.959,11.364) 35.323,9 35.824,9 36.324,8.5 39.887,8.5 40.31,8.077 U1.11
  Bottom Layer w0.254: v1(32.959,11.364) J1.7
SD_DATA1: J1.8 U1.6 | length 10.4
  Top Layer w0.254: v1(35.31,4.724) U1.6
  Bottom Layer w0.254: J1.8 33.759,10.264 33.02,9.525 33.02,5.842 34.138,4.724 v1(35.31,4.724)
TXD: IC1.1 U1.3 | length 35.9
  Top Layer w0.254: v1(2.642,3.835) 2.649,3.828 IC1.1 ; v1(25.4,6.756) 26.656,6.756 29.1,9.2 31.516,9.2 32.31,8.406 U1.3
  Bottom Layer w0.254: v1(2.642,3.835) 5.563,6.756 v1(25.4,6.756)
VBAT+: C7.2 IC2.9 IC2.10 J5.2 Q1.4 Q1.7 R7.2 | length 30.7
  Top Layer w0.254: J5.2@7.8,27.6 J5.2 10.287,27.571 ; IC2.10 10.684,26.07 10.287,26.467 10.287,27.571 ; 10.8,27.571 C7.2 ; IC2.9 11.184,27.571 ; R7.2 12.09,29.032 11.684,28.626 11.684,27.571 ; Q1.7 20.726,24.867 21.412,25.552 21.412,28.296 20.828,28.88 20.157,28.88 ; Q1.4 20.157,25.792 20.157,28.88 ; 10.287,27.571 10.5,27.571 11.184,27.571 ; 11.184,27.571 11.684,27.571 ; 11.684,27.571 17.26,27.571 18.569,28.88 20.157,28.88
VBAT-: C11.1 IC3.6 J5.1 Q2.3 | length 39.8
  Top Layer w0.254: J5.1 9.471,29.071 9.9,29.5 9.9,31 10.3,31.4 v1(11.1,31.4) 11.7,31.4 12.391,30.709 C11.1 ; v1(21.5,18.3) 22.3,19.1 22.3,22.2 22.9,22.8 23.7,22.8 23.95,22.55 IC3.6 ; Q2.3 v1(23.398,14.198)
  Bottom Layer w0.254: v1(11.1,31.4) 11.1,26.1 15.3,21.9 17.9,21.9 v1(21.5,18.3) 23.398,16.402 v1(23.398,14.198)
VDD33: C9.2 C10.2 J1.4 L2.2 PS1.A1 R1.2 S3.2 U1.33 | length 75.7
  Top Layer w0.254: C9.2 24.486,28.626 25.629,27.483 25.629,27.432 ; PS1.A1 25,25.94 25.629,26.568 25.629,27.432 ; C10.2@26.238,30.059 26.238,28.804 26.67,28.372 26.67,27.432 ; R1.2 27.534,8.255 28.677,9.398 v1(28.677,10.16) ; L2.2 29.972,25.4 ; v1(32.258,21.717) 32.31,21.769 U1.33 32.31,24.99 31.9,25.4 29.972,25.4 ; v1(50.47,11.506) 54.204,11.506 54.686,11.024 S3.2 ; 25.629,27.432 26.67,27.432 ; 26.67,27.432 28.397,27.432 29.972,25.857 29.972,25.4
  Bottom Layer w0.254: v1(28.677,10.16) 28,10.837 28,12.7 29.54,14.24 29.54,14.664 ; v1(32.258,21.717) 32.258,20.828 ; J1.4 29.54,14.664 ; v1(50.47,11.506) 50.47,20.523 49.657,21.336 43.815,21.336 43.307,20.828 32.258,20.828 ; 29.54,14.664 29.54,18.11 32.258,20.828
VUSB: C6.2 D1.1 FB1.2 IC2.1 IC2.2 J4.1 LED1.2 LED2.1 LED3.2 Q1.3 R2.2 | length 61.6
  Top Layer w0.254: LED3.2 1.321,24.257 0.813,23.749 0.813,22.962 1.422,22.352 6.096,22.352 6.731,21.717 6.731,18.121 ; J4.1 6.731,18.121 ; C6.2 8.331,18.121 ; LED2.1 9.906,16.383 8.763,17.526 8.763,18.121 ; v1@10.252,18.157 10.255,18.121 9.169,18.121 ; v1(10.295,18.161) 11.184,19.05 IC2.2 ; IC2.1 10.684,19.549 10.211,19.075 9.398,19.075 9.169,18.847 9.169,18.121 ; FB1.2 13.132,11.811 13.462,12.141 16.916,12.141 17.5,12.725 17.5,16.7 ; v1(13.462,18.161) 14.275,18.161 ; D1.1 14.453,20.777 14.275,20.599 14.275,18.161 ; LED1.2@16.612,16.027 16.612,18.161 ; R2.2 17.5,16.7 ; Q1.3 20.132,20.183 18.872,18.923 18.872,18.161 17.5,18.161 ; 6.731,18.121 8.331,18.121 ; 8.331,18.121 8.763,18.121 ; 8.763,18.121 9.169,18.121 ; 14.275,18.161 16.612,18.161 ; 16.612,18.161 17.5,18.161 ; 17.5,16.7 17.5,18.161
  Bottom Layer w0.254: v1(10.295,18.161) v1(13.462,18.161)
pads on no net: ANT1.2 ANT1.3 ANT1.4 IC1.2 IC1.3 IC1.6 IC1.8 IC1.9 IC1.10 IC1.11 IC1.12 IC1.13 IC1.14 IC1.19 IC1.22 IC1.23 IC1.24 IC1.27 IC1.28 IC3.4 J1.1 J1.2 J1.10 J4.6 J4.7 J4.8 J4.9 J4.10 J4.11 J5.

## Polygon pours and split planes (outlines as drawn)
GND on Bottom Layer "GND" (solid, pour order 2): 0.4,1.4 ccw(c1.4,1.4) 1.4,0.4 62.1,0.4 ccw(c62.1,1.4) 63.1,1.4 63.1,19 57.6,19 cw(c57.6,19.1) 57.5,19.1 57.5,32.3 1.3,32.3 ccw(c1.3,31.4) 0.4,31.4
GND on Top Layer "GND" (solid, pour order 0): 0.4,31.4 0.4,1.4 ccw(c1.4,1.4) 1.4,0.4 62.1,0.4 ccw(c62.1,1.4) 63.1,1.4 63.1,19 57.5,19 57.5,32.3 1.3,32.3 ccw(c1.3,31.4)